# EAGLE board tiny2313_stepper (EAGLE 5.04)
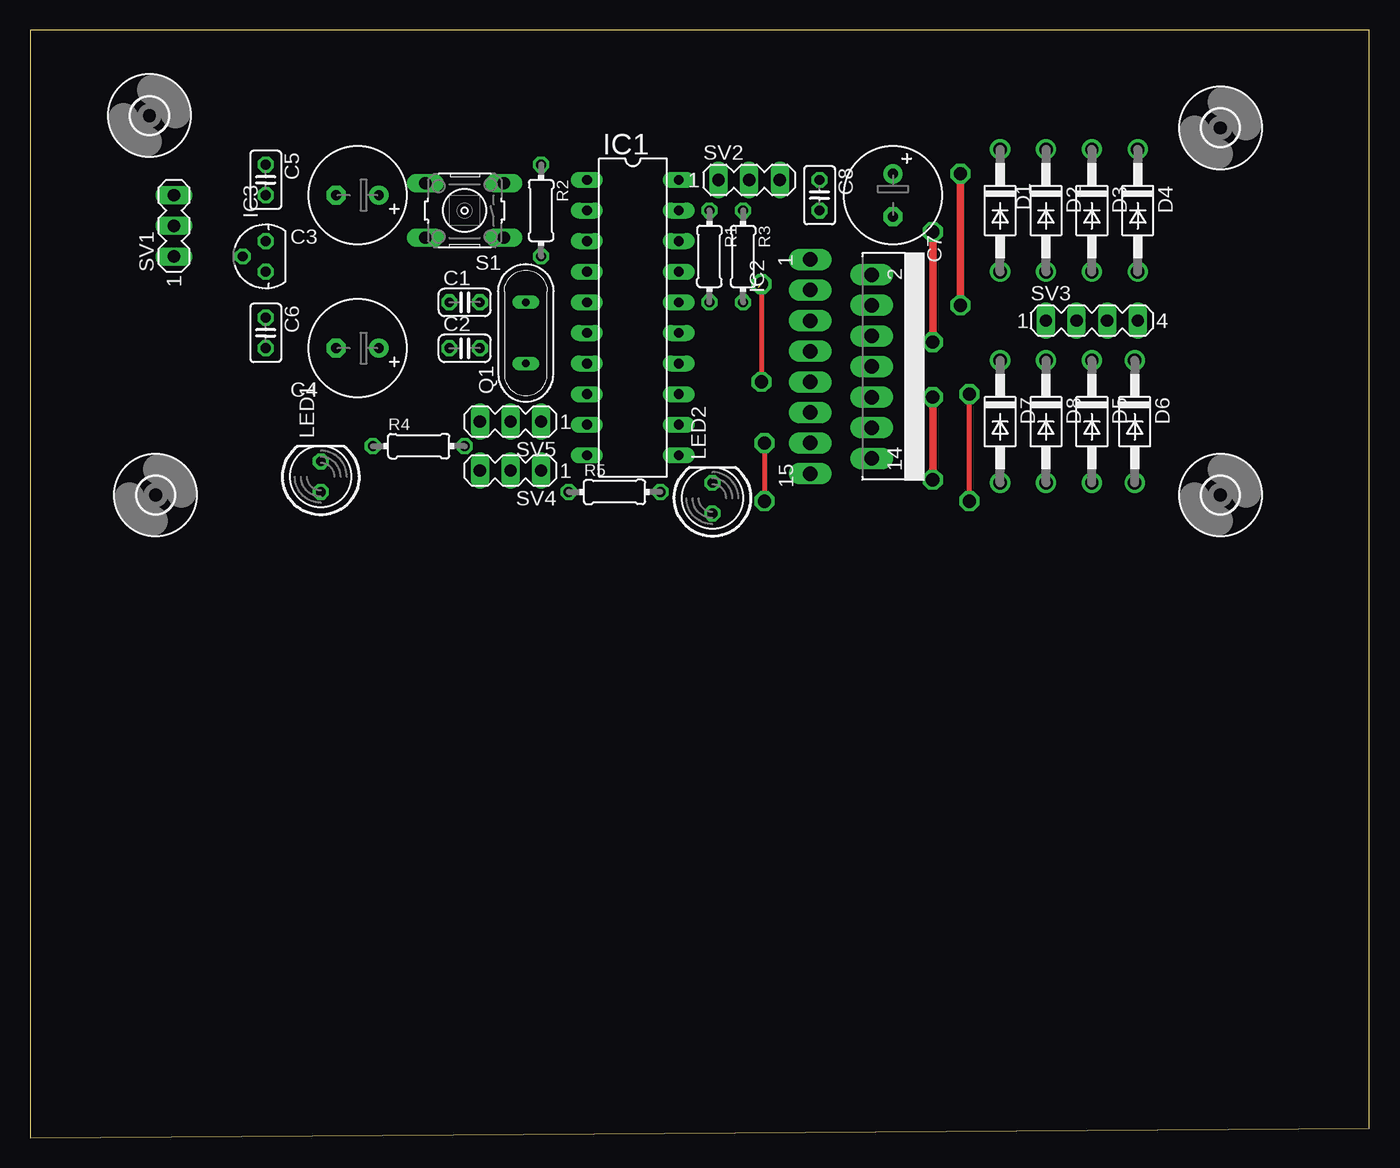
[diagram p0: board, top side]
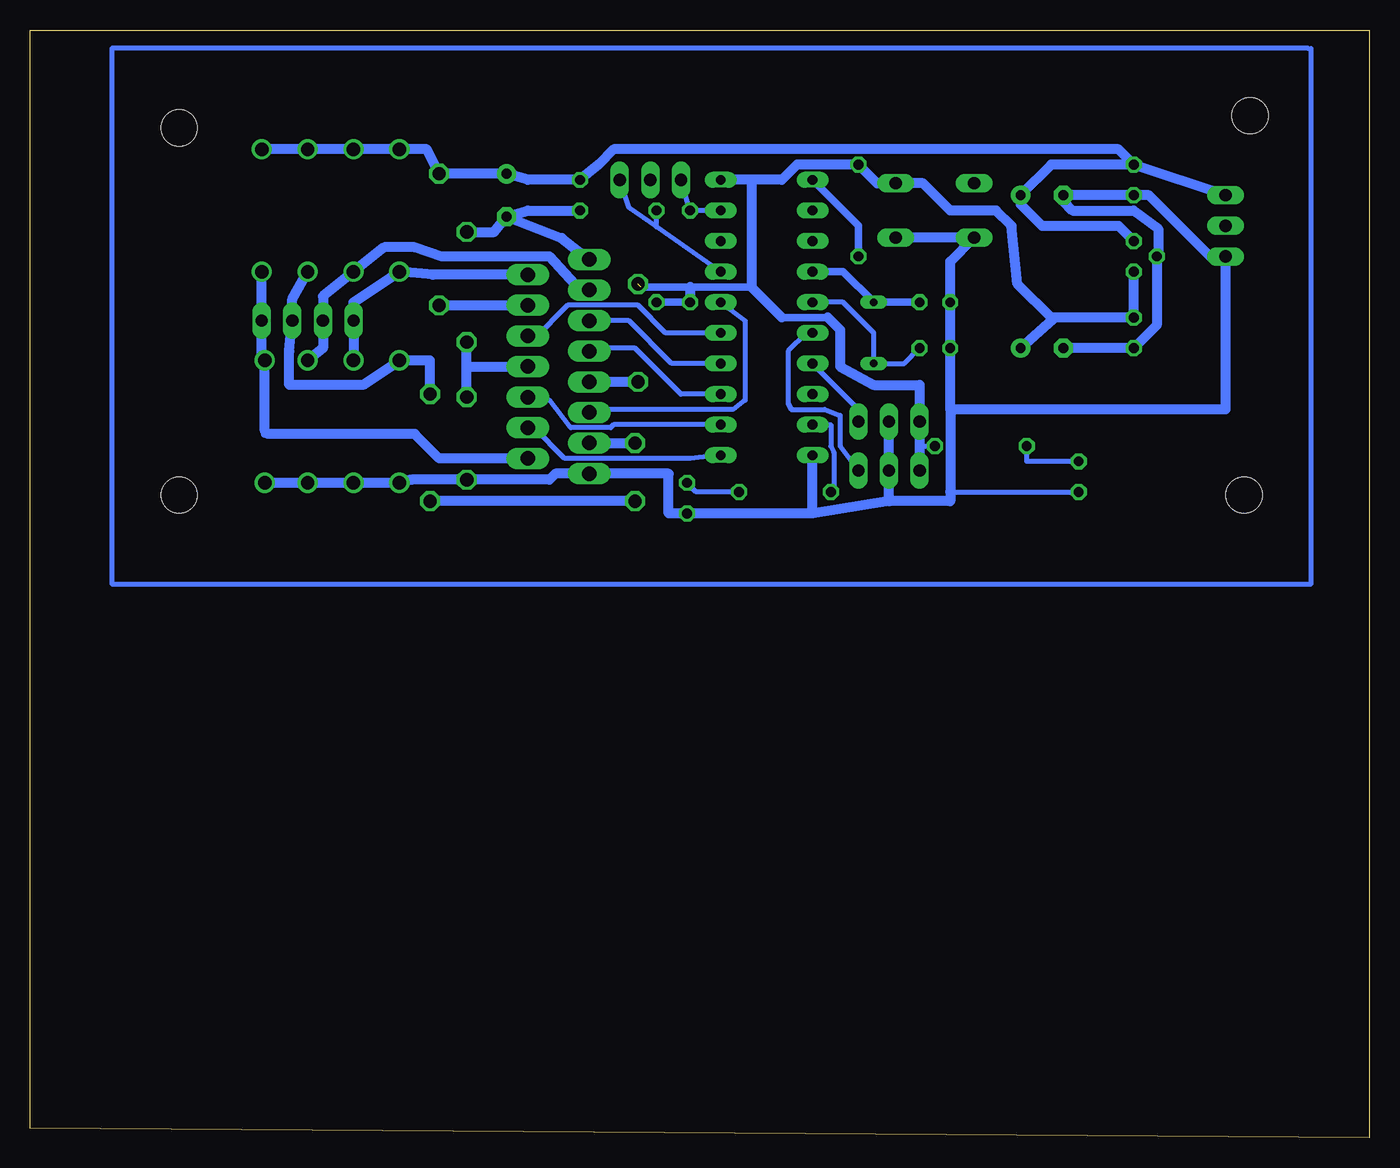
[diagram p1: board, bottom side, seen from below]

Size 111.18 x 91.94 mm. Coordinates in mm from the lower left corner, seen from the top.
Outline: 0,0 111.18,0.76 111.18,91.94 0,91.94 0,0
Copper layers (1*16): Top 0.035mm / dielectric 1.5mm / Bottom 0.035mm
Design rules "default": minimum track width 10mil, minimum drill 24mil, track to track 8mil, track to pad 8mil, pad to pad 8mil, via to via 8mil, smd to smd 8mil, copper to edge 40mil, drill to drill 8mil, minimum pad ring 10mil, minimum via ring 8mil, stop-mask expansion 4mil, vias tented up to drill 0mil, thermal gap 10mil

## Footprints (pad centres in the part's own frame; a part is rotated, then mirrored left to right if it is on the bottom)
C025-024X044 = drill 0.813 octagon: 1 -1.27,0; 2 1.27,0
E3,5-8 = drill 0.813 pad 1.6 round: + -1.778,0 | drill 0.813 pad 1.6 octagon: - 1.778,0
C025-025X050 = drill 0.813 octagon: 1 -1.27,0; 2 1.27,0
DO41-10 = drill 1.118 round: A 5.08,0; C -5.08,0
3,0 = hole 3: 0,0
DIL20 = drill 0.813 long: 1 -11.43,-3.81; 2 -8.89,-3.81; 3 -6.35,-3.81; 4 -3.81,-3.81; 5 -1.27,-3.81; 6 1.27,-3.81; 7 3.81,-3.81; 8 6.35,-3.81; 9 8.89,-3.81; 10 11.43,-3.81; 11 11.43,3.81; 12 8.89,3.81; 13 6.35,3.81; 14 3.81,3.81; 15 1.27,3.81; 16 -1.27,3.81; 17 -3.81,3.81; 18 -6.35,3.81; 19 -8.89,3.81; 20 -11.43,3.81
MULTIWATT-15 = drill 1.2 long: 1 -8.89,-7.62; 2 -7.62,-2.54; 3 -6.35,-7.62; 4 -5.08,-2.54; 5 -3.81,-7.62; 6 -2.54,-2.54; 7 -1.27,-7.62; 8 0,-2.54; 9 1.27,-7.62; 10 2.54,-2.54; 11 3.81,-7.62; 12 5.08,-2.54; 13 6.35,-7.62; 14 7.62,-2.54; 15 8.89,-7.62
78LXX = drill 0.813 octagon: GND 0,1.905; IN 1.27,0; OUT -1.27,0
LED5MM = drill 0.813 octagon: A -1.27,0; K 1.27,0
QS = drill 0.61 long: 1 -2.54,0; 2 2.54,0
0204/7 = drill 0.813 octagon: 1 -3.81,0; 2 3.81,0
B3F-10XX = drill 1.016 long: 1 -3.251,2.261; 2 3.251,2.261; 3 -3.251,-2.261; 4 3.251,-2.261
MA03-1 = drill 1.016 long: 1 -2.54,0; 2 0,0; 3 2.54,0
MA04-1 = drill 1.016 long: 1 -3.81,0; 2 -1.27,0; 3 1.27,0; 4 3.81,0

## Placement (x,y rotation side)
C1  22pf  [C025-024X044]  36.07,69.34 0 top
C2  22pf  [C025-024X044]  36.07,65.53 0 top
C3  470uf  [E3,5-8]  27.18,78.23 180 top
C4  470uf  [E3,5-8]  27.18,65.53 180 top
C5  0.1uf  [C025-025X050]  19.56,79.5 270 top
C6  0.1uf  [C025-025X050]  19.56,66.8 270 top
C7  470uf  [E3,5-8]  71.63,78.23 270 top
C8  0.1uf  [C025-025X050]  65.53,78.23 270 top
D1  1N4004  [DO41-10]  80.52,76.96 270 top
D2  1N4004  [DO41-10]  84.33,76.96 270 top
D3  1N4004  [DO41-10]  88.14,76.96 270 top
D4  1N4004  [DO41-10]  91.95,76.96 270 top
D5  1N4004  [DO41-10]  88.14,59.44 270 top
D6  1N4004  [DO41-10]  91.69,59.44 270 top
D7  1N4004  [DO41-10]  80.52,59.44 270 top
D8  1N4004  [DO41-10]  84.33,59.44 270 top
H1  MOUNT-HOLE3.0  [3,0]  98.81,53.34 0 top
H2  MOUNT-HOLE3.0  [3,0]  98.81,83.82 0 top
H3  MOUNT-HOLE3.0  [3,0]  10.41,53.34 0 top
H4  MOUNT-HOLE3.0  [3,0]  9.91,84.84 0 top
IC1  ATTINY2313V-10P  [DIL20]  50.04,68.07 270 top
IC2  L298  [MULTIWATT-15]  72.39,64.01 270 top
IC3  78l05  [78LXX]  19.56,73.15 90 top
LED1  [LED5MM]  24.13,54.86 90 top
LED2  [LED5MM]  56.64,53.09 90 top
Q1  16mHz  [QS]  41.15,66.8 90 top
R1  4k7  [0204/7]  56.39,73.15 270 top
R2  [0204/7]  42.42,76.96 270 top
R3  4k7  [0204/7]  59.18,73.15 270 top
R4  [0204/7]  32.26,57.4 0 top
R5  [0204/7]  48.51,53.59 0 top
S1  reset  [B3F-10XX]  36.07,76.96 180 top
SV1  +12v  [MA03-1]  11.94,75.69 90 top
SV2  i2c  [MA03-1]  59.69,79.5 0 top
SV3  Mot  [MA04-1]  88.14,67.82 0 top
SV4  home  [MA03-1]  39.88,55.37 180 top
SV5  end  [MA03-1]  39.88,59.44 180 top

## Library data of the parts
C1 C2 R1 R3 = resistor
C3-C8 R2 R4 R5 = rcl
D1-D8 = diode
H1-H4 = holes
IC1 = avr
IC2 = st-microelectronics
IC3 = v-reg
LED1 LED2 = led
Q1 = special
S1 = switch-omron
SV1-SV5 = con-lstb

## Nets
+5V: C4.+ C6.1 IC1.20 IC2.9 IC3.OUT R1.2 R2.1 R3.2 R4.2 S1.3 SV4.3 SV5.3
+12V: C3.+ C5.1 C7.+ C8.1 D1.C D2.C D3.C D4.C IC2.4 IC3.IN SV1.3
GND: C1.1 C2.1 C3.- C4.- C5.2 C6.2 C7.- C8.2 D5.A D6.A D7.A D8.A IC1.10 IC2.1 IC2.8 IC2.15 IC3.GND LED1.A LED2.A S1.1 S1.2 SV1.1 SV4.2 SV5.2
N$1: C1.2 IC1.4 Q1.2
N$2: C2.2 IC1.5 Q1.1
N$3: IC1.1 R2.2
N$4: IC1.19 R1.1 SV2.1
N$5: IC1.17 R3.1 SV2.3
N$6: IC1.6 SV4.1
N$7: IC1.16 IC2.11
N$8: IC1.15 IC2.6
N$9: IC1.14 IC2.5
N$10: IC1.13 IC2.7
N$11: IC1.12 IC2.10
N$12: IC1.11 IC2.12
N$13: IC1.7 SV5.1
N$14: D1.A D8.C IC2.2 SV3.1
N$15: D2.A D5.C IC2.3 SV3.2
N$16: D3.A D7.C IC2.13 SV3.3
N$17: D4.A D6.C IC2.14 SV3.4
N$19: LED1.K R4.1
N$20: LED2.K R5.2
N$22: IC1.9 R5.1

## Tracks (layer width: path | path; a pad name or v marks a point on that pad's centre or on a via)
+5V  (via drill 1.1 pad 1.27)  (2 unrouted)
  Top 0.406: v60.71,70.87 v60.71,62.74
  Bottom 0.406: 26.42,68.07 26.29,67.95 | SV5.3 37.34,57.4 R4.2
  Bottom 0.61: 51.31,70.61 56.39,70.61 60.45,70.61 | 48.77,68.07 44.96,68.07 | R1.2 R3.2
  Bottom 0.813: IC3.OUT C6.1 26.42,68.07 | C4.+ 26.29,67.95 29.21,70.87 29.72,75.69 30.99,76.96 34.8,76.96 37.06,79.22 S1.3 40.87,79.22 R2.1 47.5,80.77 48.77,79.5 51.31,79.5 | 51.31,79.5 IC1.20 | v60.71,62.74 IC2.9 | 51.31,79.5 51.31,70.61 48.77,68.07 | SV4.3 37.34,57.4 37.34,62.48 41.15,62.48 43.94,64.01 43.94,67.06 44.96,68.07 | 56.39,70.61 R1.2
+12V  (via drill 1.1 pad 1.27)
  Top 0.61: v77.22,80.01 v77.22,69.09
  Bottom 0.406: C3.+ 28.96,77.47
  Bottom 0.813: SV1.3 C5.1 | C5.1 26.42,80.77 C3.+ | 28.96,77.47 27.18,75.69 20.83,75.69 IC3.IN | C5.1 20.83,82.04 62.74,82.04 64.01,80.77 C8.1 69.85,79.5 C7.+ v77.22,80.01 78.23,82.04 D1.C D2.C D3.C D4.C | v77.22,69.09 IC2.4
GND  (via drill 1.1 pad 1.27)
  Top 0.61: v74.93,66.04 v74.93,75.18 | v74.93,54.61 v74.93,61.47
  Bottom 0.406: SV1.1 13.21,73.15 | C3.- 25.4,77.72 | 17.53,73.53 IC3.GND | C1.1 C2.1 | 34.8,53.59 LED1.A
  Bottom 0.813: 13.21,73.15 18.29,78.23 C5.2 C3.- | 25.4,77.72 24.64,76.96 19.56,76.96 17.53,75.44 17.53,73.53 | IC3.GND 17.65,67.44 C6.2 C4.- | SV1.1 11.94,60.45 34.8,60.45 | 39.88,52.83 34.8,52.83 34.8,53.59 34.8,60.45 | 39.88,52.83 46.23,51.82 | 34.8,60.45 C1.1 34.8,72.72 S1.2 S1.1 | C8.2 69.85,76.96 C7.- | IC2.1 67.06,74.68 C7.- | 74.93,64.01 IC2.8 | 74.93,64.01 v74.93,66.04 | v74.93,75.18 72.64,75.18 C7.- | v74.93,61.47 74.93,64.01 | 46.23,51.82 LED2.A 58.17,51.82 58.17,55.12 IC2.15 67.56,55.12 68.07,54.61 v74.93,54.61 79.5,54.61 D7.A D8.A D5.A D6.A | 46.23,51.82 IC1.10 | SV5.2 SV4.2 39.88,52.83
N$1
  Bottom 0.61: IC1.4 43.69,71.88 Q1.2 C1.2
N$2
  Bottom 0.406: IC1.5 43.69,69.34 41.15,66.8 Q1.1 38.61,64.26 C2.2
N$3
  Bottom 0.61: R2.2 42.42,75.69 IC1.1
N$4
  Bottom 0.406: IC1.19 R1.1 | R1.1 SV2.1 | IC1.19 53.59,76.96 | IC1.19 R1.1
N$5
  Bottom 0.406: IC1.17 59.17,75.61 | 59.17,75.61 61.47,77.22 SV2.3 | R3.1 59.18,75.62 59.17,75.61
N$6
  Bottom 0.406: IC1.6 46.74,66.8 48.26,65.28 48.26,60.96 48.01,60.45 45.21,60.45 43.94,59.94 43.94,57.4 SV4.1
N$7
  Bottom 0.406: IC1.16 51.82,67.82 51.82,61.21 52.83,60.45 64.26,60.45 IC2.11
N$8
  Bottom 0.406: IC1.15 58.42,66.8 60.71,69.09 66.55,69.09 69.34,66.29 69.6,66.29 IC2.6
N$9
  Bottom 0.406: IC1.14 57.91,64.26 61.47,67.82 IC2.5
N$10
  Bottom 0.406: IC1.13 57.15,61.72 60.96,65.53 64.52,65.53 IC2.7
N$11
  Bottom 0.406: IC1.12 62.74,59.18 62.99,58.93 66.29,58.93 68.07,61.21 69.6,61.21 IC2.10
N$12
  Bottom 0.406: IC1.11 56.39,56.39 66.8,56.39 69.34,58.93 IC2.12
N$13
  Bottom 0.406: SV5.1 42.42,60.45 IC1.7
N$14
  Bottom 0.813: IC2.2 77.72,71.63 D1.A 84.33,69.34 SV3.1 D8.C
N$15
  Bottom 0.61: IC2.3 65.53,70.36
  Bottom 0.813: 65.53,70.36 68.07,73.15 76.96,73.15 79.25,73.91 81.79,73.91 D2.A 86.87,69.85 SV3.2 86.87,65.53 D5.C
N$16  (via drill 1.1 pad 1.27)
  Top 0.406: v60.96,57.66 v60.96,52.83 | v77.98,52.83 v77.98,61.72
  Bottom 0.813: D3.A 89.41,69.6 SV3.3 89.66,65.28 89.66,62.48 83.57,62.48 D7.C 77.98,64.52 v77.98,61.72 | IC2.13 v60.96,57.66 | v60.96,52.83 v77.98,52.83
N$17
  Bottom 0.61: 91.69,58.42 91.44,58.42 91.69,58.67
  Bottom 0.813: IC2.14 77.22,56.39 79.25,58.42 91.44,58.42 | D4.A SV3.4 91.95,65.02 D6.C 91.69,58.67
N$18
  Bottom 0.406: 5.08,90.42 104.39,90.42 104.39,45.97 4.83,45.97 4.83,90.42
N$19
  Bottom 0.406: LED1.K 28.45,56.13 R4.1
N$20
  Bottom 0.406: R5.2 55.88,53.59 LED2.K
N$22
  Bottom 0.406: IC1.9 44.7,59.18 44.7,57.4 44.45,56.9 44.45,54.1 R5.1